# Altium PCB PCB1.PcbDoc
Units mil, origin at the board's own origin, x right, y up, seen from the top; angles counter-clockwise.
Board outline 6170 x 4190 mil, 2 copper layers (Top Layer, Bottom Layer); 55 components, 68 nets, 385 pads, 47 vias.
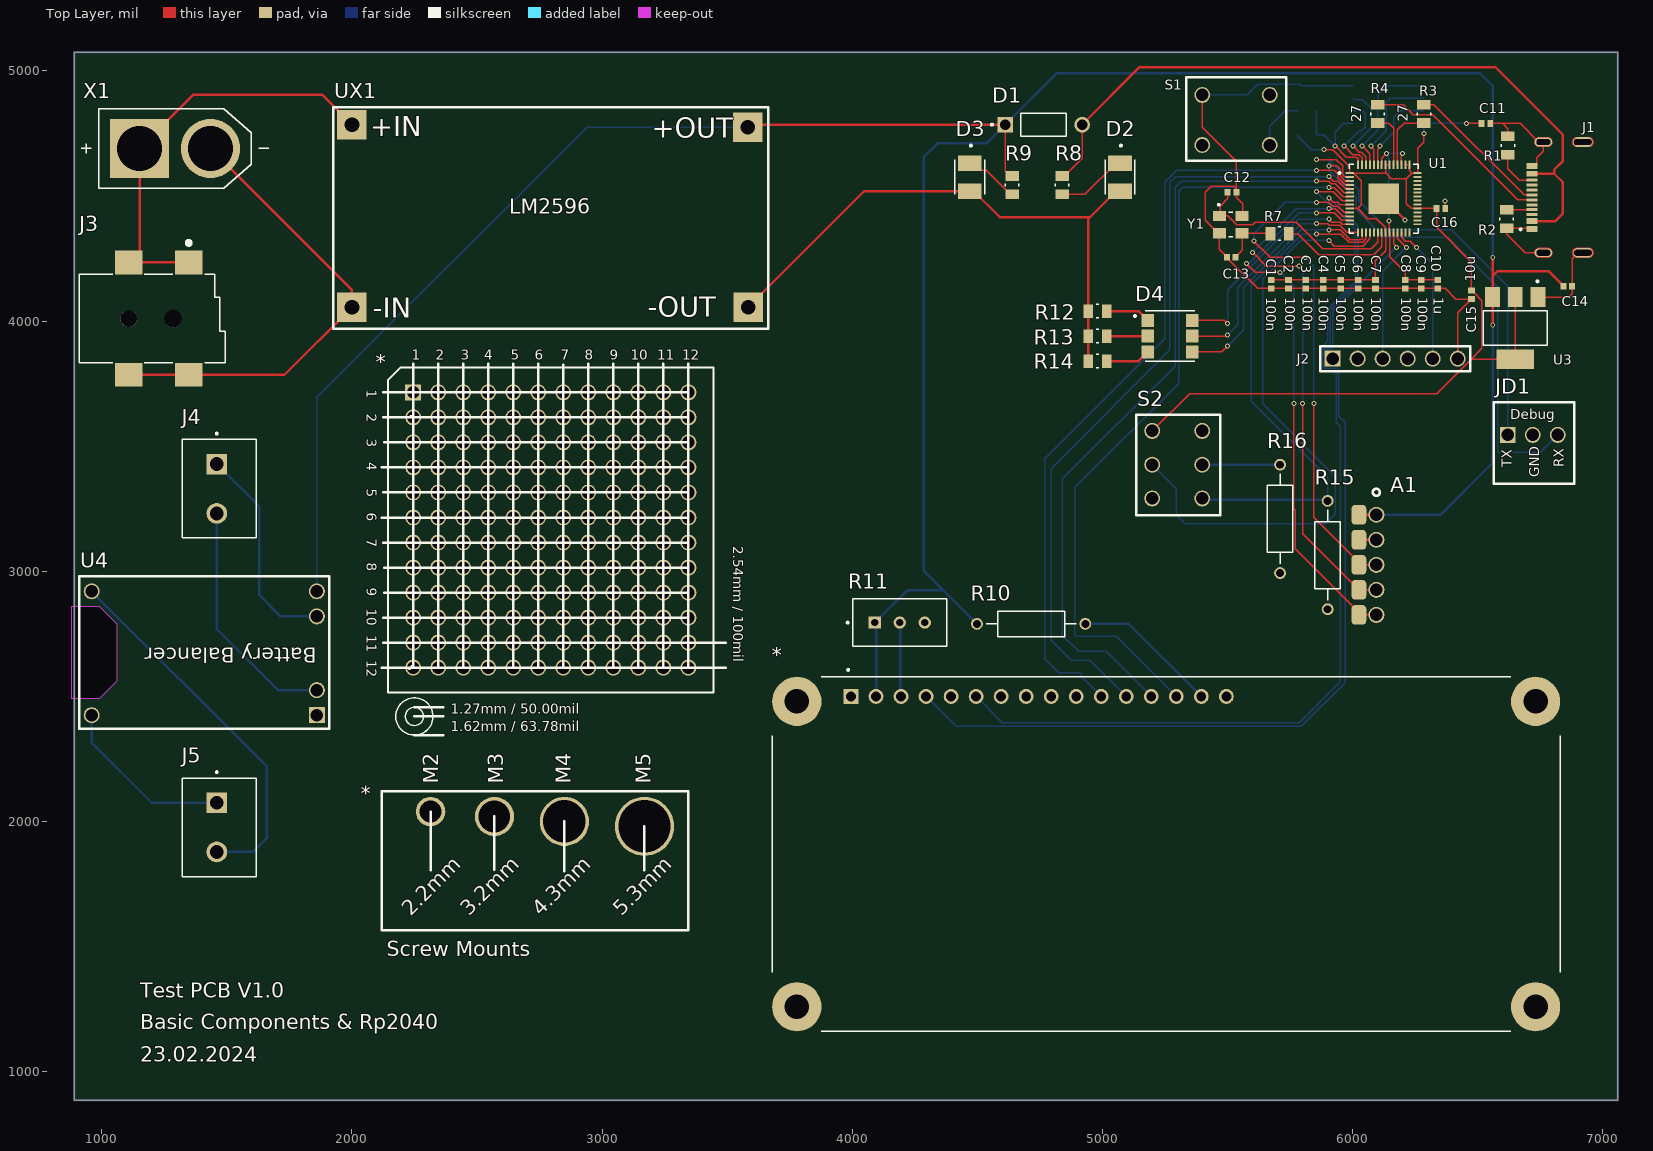
[diagram p0: Top Layer view]
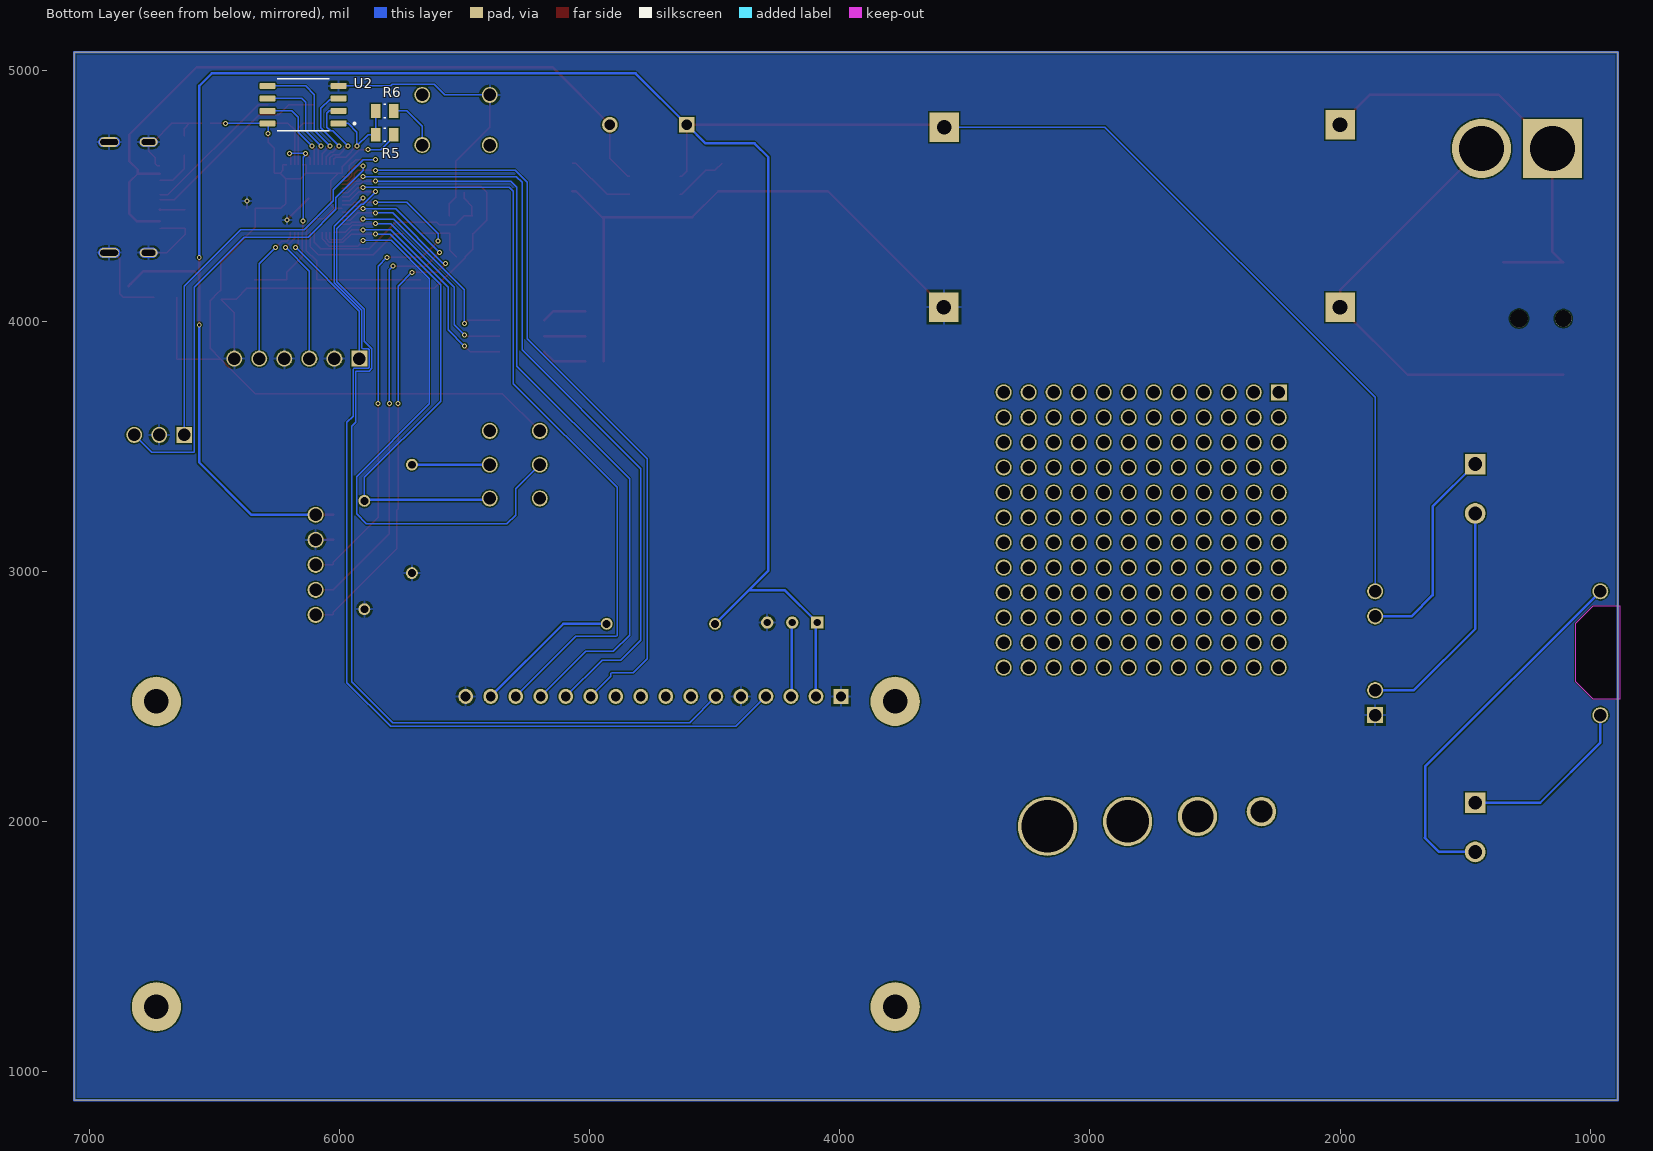
[diagram p1: Bottom Layer view, seen from below]
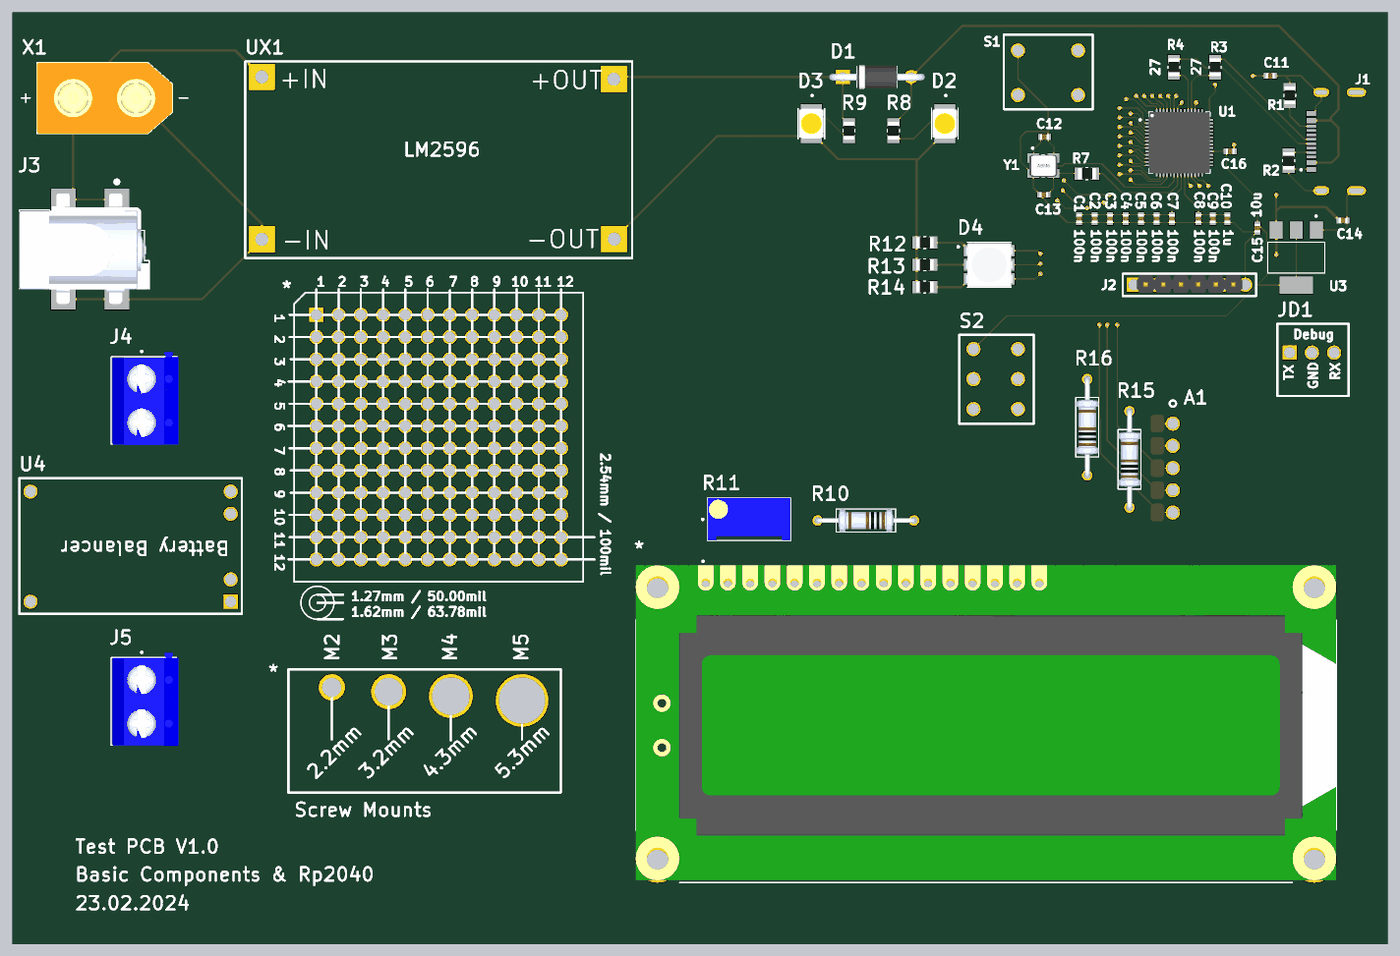
[diagram p2: 3D render of the assembled board from above, using the file's embedded part models]
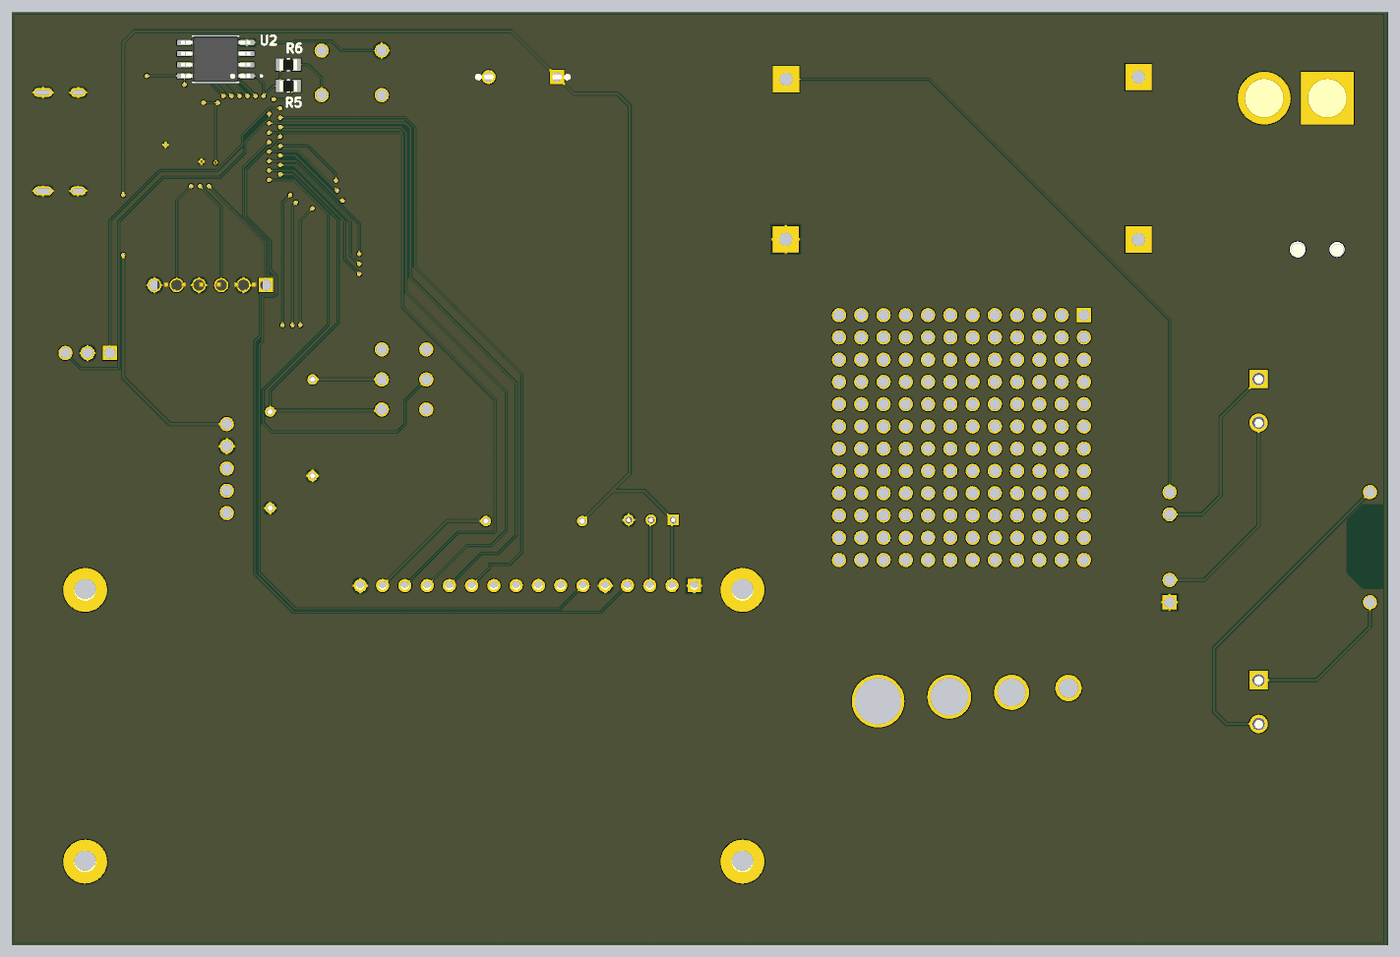
[diagram p3: 3D render of the assembled board from below, using the file's embedded part models]

## Layer stack, top to bottom
Top Solder: solder mask 0.4, Solder Resist, Dk 3.5
Top Layer: signal copper 1.4
Dielectric 1: dielectric 12.6, FR-4, Dk 4.8
Bottom Layer: signal copper 1.4
Bottom Solder: solder mask 0.4, Solder Resist, Dk 3.5

## Board outline
890,885 890,5075 7060,5075 7060,885
cut-out: 990,2860 1060,2790 1060,2560 990,2490 880,2490 880,2860

## Design rules (kind name [scope] priority, off if disabled: settings)
Clearance Clearance_1 [OnMid vs OnMid] p1: gap=5 ignorepadtopadclearanceinfootprint=FALSE sourcerule=38 cellrowname=All cellrowtype=0 cellcolname=All cellcoltype=0 innerlayers=TRUE
Clearance Clearance_2 [(ExistsOnLayer('Top Layer') Or ExistsOnLayer('Bottom Layer')) vs (ExistsOnLayer('Top Layer') Or ExistsOnLayer('Bottom Layer'))] p2: gap=5 ignorepadtopadclearanceinfootprint=FALSE sourcerule=38 cellrowname=All cellrowtype=0 cellcolname=All cellcoltype=0 outerlayers=TRUE
Clearance [All] p3: gap=10 ignorepadtopadclearanceinfootprint=FALSE ismatrix=TRUE
PolygonConnect [All] p1: connectstyle=Relief reliefconductorwidth=10 reliefentries=4 polygonreliefangle="90 Angle" airgapwidth=10
RoutingVias RoutingViaStyle_1 [All] p1: holewidth=11.81 width=19.68 viastyle="Through Hole" minholewidth=11.81 minwidth=19.68 maxholewidth=50 maxwidth=50
RoutingVias [All] p2: holewidth=28 width=50 viastyle="Through Hole" minholewidth=28 minwidth=50 maxholewidth=28 maxwidth=50
SolderMaskExpansion [All] p1: expansion=4 istentingtop=FALSE
Width MaxMinWidth_1 [All] p1: maxlimit=10 minlimit=5 preferedwidth=5 minimp=50.000000 maximp=50.000000 favimp=50.000000
Width [All] p2: maxlimit=10 minlimit=10 preferedwidth=10
30 further rules are at their usual default settings.

## Classes and differential pairs
component class TestBoard: * A1 D4 J3 J4 J5 JD1 R10 R11 R12 R13 R14 R15 R16 S2 U4 UX1 X1
component class U_Power: C14 C15 U3
component class U_Crystal: C12 C13 R7 Y1
component class U_Flash: C11 R5 R6 S1 U2
component class U_USB: D1 D2 D3 J1 R1 R2 R8 R9
component class U_Rp2040: C1 C2 C3 C4 C5 C6 C7 C8 C9 C10 C16 J2 R3 R4 U1

## Components (designator, comment, footprint, x,y, rotation, side; value= is the part's Value field where it differs from the comment)
* "MMounts" "M Mount" 2569.46,2020.63 r0 top
* "PiHoleGrid" PinHoleGrid 2245,3715 r0 top
* "LCDDisplay" LCDDisplay 4980,2200 r0 top
A1 "HC-12" HC-12 6095,3025.85 r270 top
C1 "100n" "SMD Capacator" 5674.02,4147.8 r270 top
C2 "100n" "SMD Capacator" 5743.57,4147.8 r270 top
C3 "100n" "SMD Capacator" 5813.12,4147.8 r270 top
C4 "100n" "SMD Capacator" 5882.68,4147.8 r270 top
C5 "100n" "SMD Capacator" 5952.23,4147.8 r270 top
C6 "100n" "SMD Capacator" 6021.78,4147.8 r270 top
C7 "100n" "SMD Capacator" 6091.34,4147.8 r270 top
C8 "100n" "SMD Capacator" 6210,4147.8 r270 top
C9 "100n" "SMD Capacator" 6275,4147.8 r270 top
C10 "1u" "SMD Capacator" 6340,4147.8 r270 top
C11 "100n" "SMD Capacator" 6532.8,4790 r0 top
C12 "15p" "SMD Capacator" 5517.8,4515 r180 top
C13 "15p" "SMD Capacator" 5515,4255 r0 top
C14 "10u" "SMD Capacator" 6860,4140 r0 top
C15 "10u" "SMD Capacator" 6475,4105 r270 top
C16 "1u" "SMD Capacator" 6352.8,4450 r0 top
D1 "Diode" Diode 4755,4790 r0 top
D2 "SMD LED" "SMD LED" 5070,4575.28 r270 top
D3 "SMD LED" "SMD LED" 4470,4575.28 r270 top
D4 "RGB SMD LED" "SMD RGB LED" 5265,3940 r0 top
J1 "USB C" "USB C" 6865,4509.54 r90 top
J2 "6Pin Connector" "6Pin Connector" 6165.21,3852.54 r0 top
J3 "Barrel Plug SMD" "Barrel Plug SMD" 1192.99,4014.41 r0 top
J4 "Off Board Connector 2Pin" "OFF BORAD CONNECTOR 2PIN" 1460,3325 r270 top
J5 "Off Board Connector 2Pin" "OFF BORAD CONNECTOR 2PIN" 1460,1971.57 r270 top
JD1 "Debug Probe" DebugProbe 6719.19,3543.94 r0 top
R1 "5.1k" "SMD Resistor" 6620.56,4701.61 r90 top
R2 "5.1k" "SMD Resistor" 6615.7,4408.39 r270 top
R3 "27" "SMD Resistor" 6285,4828.39 r90 top
R4 "27" "SMD Resistor" 6100,4828.39 r90 top
R5 "10K" "SMD Resistor" 5818.39,4745 r180 bottom
R6 "10k" "SMD Resistor" 5818.39,4840 r0 bottom
R7 "1k" "SMD Resistor" 5708.39,4350 r0 top
R8 "SMD Resistor" "SMD Resistor" 4839.08,4543.39 r270 top
R9 "SMD Resistor" "SMD Resistor" 4639.08,4543.39 r270 top
R10 "220" Resistor 4710,2790 r180 top
R11 "10k" "Poti 3296" 4190,2795 r0 top
R12 "1k" "SMD Resistor" 4980,4040 r0 top
R13 "1k" "SMD Resistor" 4980,3940 r0 top
R14 "1k" "SMD Resistor" 4980,3840 r0 top
R15 "1k" Resistor 5900,3070 r90 top
R16 "1k" Resistor 5710,3214.56 r90 top
S1 "Button Switch DIP 4 Pin" "Button Switch DIP 4 Pin" 5525,4810 r90 top
S2 "Button Switch DIP 6 Pin" "Button Switch DIP 6 Pin" 5300,3425 r0 top
U1 "RP2040" RP2040 6124.13,4489.58 r0 top
U2 "W25Q128JVS" W25Q128JVS 6140,4855 r0 bottom
U3 "NCP1117" NCP1117 6650,3972.18 r270 top
U4 "BatteryBalancer" BatteryBalancer 1835,2865 r90 top
UX1 "lm2596" LM2596 2795,4470 r0 top
X1 "XT60 Battery Connector" "XT60 Battery Connector" 1293.27,4690 r0 top
Y1 "12Mh Oscillator" "12Mh Oscillator" 5525,4385 r0 top

## Footprints (in the part's own frame and the unit in brackets; to place one, negate y for a bottom-side part, rotate by r counter-clockwise, add the part's x,y. Pads: shape width x height; smd on the part's side, far side on the other; paste and mask are expansions set on the pad)
"6Pin Connector" [mm]
  rect 1.62x1.62 hole 1.27: 1(-6.228,-0.065)
  round 1.62 hole 1.27: 2(-3.688,-0.065) 3(-1.148,-0.065) 4(1.392,-0.065) 5(3.932,-0.065) 6(6.472,-0.065)
  silkscreen extent -7.5,-1.33 7.74,1.21, body extent -5.87,-1 6.13,1, height 6
"12Mh Oscillator" [mm]
  rect 1.3x1.05 smd: 1(-1.459,0.893) 2(0.841,0.893) 3(0.841,-0.857) 4(-1.459,-0.857)
  silkscreen extent -1.62,-1.23 -0.13,2.13, body extent -1.91,-1.23 1.29,1.27, height 0.8
"Barrel Plug SMD" [mm]
  rect 2.8x2.4 smd: 1A(3.937,5.588) 1B(-2.163,5.588) 2(-2.163,-5.812) 3(3.937,-5.812)
  round 1.7 hole 1.7 unplated: ""(-2.163,-0.112)
  round 1.8 hole 1.8 unplated: ""(2.337,-0.112)
  silkscreen extent -7.16,-4.61 7.64,7.78, body extent -7.2,-6.35 7.7,6.25, height 11
BatteryBalancer [mm]
  round 1.62 hole 1.27: "Bat +"(-1.143,-0.635) "Bat -"(-8.636,-0.635) "GND In"(-11.176,22.225) Vin(1.397,22.225) Vout+(1.397,-0.635)
  rect 1.62x1.62 hole 1.27: "Vout -"(-11.176,-0.635)
  silkscreen extent -12.57,-1.91 2.92,23.49, body extent -12.6,-1.91 2.92,23.49, height 4
"Button Switch DIP 4 Pin" [mm]
  round 1.62 hole 1.27: 1(-2.697,3.203) 2(2.383,3.203) 3(-2.697,-3.655) 4(2.383,-3.655)
  silkscreen extent -4.32,-5.33 4.19,4.83, body extent -3.94,-4.95 3.81,4.44, height 6
"Button Switch DIP 6 Pin" [mm]
  round 1.62 hole 1.27: 1(-2.57,3.457) 2(2.51,3.457) 3(-2.57,-3.401) 4(2.51,-3.401) A(-2.57,0.028) K(2.51,0.028)
  silkscreen extent -4.19,-5.08 4.32,5.08, body extent -3.81,-4.7 3.94,4.7, height 6
DebugProbe [mm]
  round 1.62 hole 1.27: GND(0.02,0.027) RX(2.56,0.027)
  rect 1.62x1.62 hole 1.27: TX(-2.52,0.027)
  silkscreen extent -3.92,-4.93 4.21,3.33
Diode [mm]
  round 1.59 hole 1.06: A(4.159,-0.127)
  rect 1.59x1.59 / inner round 1.59 / far side rect 1.59x1.59 hole 1.06: K(-3.651,-0.127)
  silkscreen extent -5.1,-1.31 2.57,1.05, body extent -5.22,-1.47 5.73,1.22, height 2.69
HC-12 [mm]
  round 1.62 hole 1.27: GND(-2.54,0) RXD(0,0) SET(5.08,0) TXD(2.54,0) VCC(-5.08,0)
  rrect50% 2x1.5 smd paste-1 mask+0: GND(-2.54,-1.778) RXD(0,-1.778) SET(5.08,-1.778) TXD(2.54,-1.778) VCC(-5.08,-1.778)
  silkscreen extent -7.72,-0.36 -7.01,0.36, body extent -6.48,-2.79 6.86,24.51, height 5
LCDDisplay [mm]
  rect 1.508x1.508 hole 1: 1(-25.015,7.618)
  round 1.508 hole 1: 2(-22.475,7.618) 3(-19.935,7.618) 4(-17.395,7.618) 5(-14.855,7.618) 6(-12.315,7.618) 7(-9.775,7.618) 8(-7.235,7.618) 9(-4.695,7.618) 10(-2.155,7.618) 11(0.385,7.618) 12(2.925,7.618) 13(5.465,7.618) 14(8.005,7.618) 15(10.545,7.618) 16(13.085,7.618)
  round 5 hole 2.5: S1(-30.515,7.118) S2(44.485,7.118) S3(44.485,-23.882) S4(-30.515,-23.882)
  silkscreen extent -33.01,-26.38 46.98,10.42, body extent -33.02,-26.13 46.99,9.87, height 11
LM2596 [mm]
  rect 3x3 hole 1.5 paste-2539.97 mask+0.102: 1(-20.193,-10.541) 2(-20.193,8.001) 3(20.044,-10.519) 4(20,7.751)
  silkscreen extent -22.1,-12.7 22.1,9.78, body extent -22.22,-12.7 22.1,9.78, height 15
"M Mount" [mm]
  round 3 hole 2.2: 2(-6.477,0.484)
  round 4 hole 3.2: 2(0.014,-0.016)
  round 5 hole 4.3: 2(7.112,-0.516)
  round 6 hole 5.3: 2(15.24,-1.016)
  silkscreen extent -11.43,-11.56 19.68,2.54
NCP1117 [mm]
  rect 2x1.5 smd: 1(-3.15,2.3) 2(-3.15,0) 3(-3.15,-2.3)
  rect 2x3.8 smd: 4(3.15,0)
  silkscreen extent -4.85,-3.25 1.75,3.25
"OFF BORAD CONNECTOR 2PIN" [mm]
  rect 2.1x2.1 hole 1.4: 1(-2.627,0)
  round 2.1 hole 1.4: 2(2.373,0)
  silkscreen extent -5.83,-3.5 4.87,4, body extent -5.68,-3.31 4.92,4.19, height 10
PinHoleGrid [mm]
  rect 1.62x1.62 hole 1.27: 1(0,0)
  round 1.62 hole 1.27: 2(2.54,0) 3(5.08,0) 4(7.62,0) 5(10.16,0) 6(12.7,0) 7(15.24,0) 8(17.78,0) 9(20.32,0) 10(22.86,0) 11(25.4,0) 12(27.94,0) 13(0,-2.54) 14(2.54,-2.54) 15(5.08,-2.54) 16(7.62,-2.54) 17(10.16,-2.54) 18(12.7,-2.54) 19(15.24,-2.54) 20(17.78,-2.54) 21(20.32,-2.54) 22(22.86,-2.54) 23(25.4,-2.54) 24(27.94,-2.54) 25(0,-5.08) 26(2.54,-5.08) 27(5.08,-5.08) 28(7.62,-5.08) 29(10.16,-5.08) 30(12.7,-5.08) 31(15.24,-5.08) 32(17.78,-5.08) 33(20.32,-5.08) 34(22.86,-5.08) 35(25.4,-5.08) 36(27.94,-5.08) 37(0,-7.62) 38(2.54,-7.62) 39(5.08,-7.62) 40(7.62,-7.62) 41(10.16,-7.62) 42(12.7,-7.62) 43(15.24,-7.62) 44(17.78,-7.62) 45(20.32,-7.62) 46(22.86,-7.62) 47(25.4,-7.62) 48(27.94,-7.62) 49(0,-10.16) 50(2.54,-10.16) 51(5.08,-10.16) 52(7.62,-10.16) 53(10.16,-10.16) 54(12.7,-10.16) 55(15.24,-10.16) 56(17.78,-10.16) 57(20.32,-10.16) 58(22.86,-10.16) 59(25.4,-10.16) 60(27.94,-10.16) 61(0,-12.7) 62(2.54,-12.7) 63(5.08,-12.7) 64(7.62,-12.7) 65(10.16,-12.7) 66(12.7,-12.7) 67(15.24,-12.7) 68(17.78,-12.7) 69(20.32,-12.7) 70(22.86,-12.7) 71(25.4,-12.7) 72(27.94,-12.7) 73(0,-15.24) 74(2.54,-15.24) 75(5.08,-15.24) 76(7.62,-15.24) 77(10.16,-15.24) 78(12.7,-15.24) 79(15.24,-15.24) 80(17.78,-15.24) 81(20.32,-15.24) 82(22.86,-15.24) 83(25.4,-15.24) 84(27.94,-15.24) 85(0,-17.78) 86(2.54,-17.78) 87(5.08,-17.78) 88(7.62,-17.78) 89(10.16,-17.78) 90(12.7,-17.78) 91(15.24,-17.78) 92(17.78,-17.78) 93(20.32,-17.78) 94(22.86,-17.78) 95(25.4,-17.78) 96(27.94,-17.78) 97(0,-20.32) 98(2.54,-20.32) 99(5.08,-20.32) 100(7.62,-20.32) 101(10.16,-20.32) 102(12.7,-20.32) 103(15.24,-20.32) 104(17.78,-20.32) 105(20.32,-20.32) 106(22.86,-20.32) 107(25.4,-20.32) 108(27.94,-20.32) 109(0,-22.86) 110(2.54,-22.86) 111(5.08,-22.86) 112(7.62,-22.86) 113(10.16,-22.86) 114(12.7,-22.86) 115(15.24,-22.86) 116(17.78,-22.86) 117(20.32,-22.86) 118(22.86,-22.86) 119(25.4,-22.86) 120(27.94,-22.86) 121(0,-25.4) 122(2.54,-25.4) 123(5.08,-25.4) 124(7.62,-25.4) 125(10.16,-25.4) 126(12.7,-25.4) 127(15.24,-25.4) 128(17.78,-25.4) 129(20.32,-25.4) 130(22.86,-25.4) 131(25.4,-25.4) 132(27.94,-25.4) 133(0,-27.94) 134(2.54,-27.94) 135(5.08,-27.94) 136(7.62,-27.94) 137(10.16,-27.94) 138(12.7,-27.94) 139(15.24,-27.94) 140(17.78,-27.94) 141(20.32,-27.94) 142(22.86,-27.94) 143(25.4,-27.94) 144(27.94,-27.94)
  silkscreen extent -3.17,-34.78 31.75,2.92
"Poti 3296" [mm]
  rect 1.248x1.248 hole 0.74: 1(-2.54,0)
  round 1.248 hole 0.74: 2(0,0) 3(2.54,0)
  silkscreen extent -5.39,-2.41 4.76,2.42, body extent -4.76,-2.41 4.76,2.42, height 11.55
Resistor [mm]
  round 1.2 hole 0.8: 1(-5.627,0) 2(5.373,0)
  silkscreen extent -4.71,-1.3 4.45,1.3, body extent -5.9,-1.3 5.65,1.3, height 2.6
RP2040 [mm]
  rrect25% 0.84x0.2 smd: 1(-3.435,2.6) 2(-3.435,2.2) 3(-3.435,1.8) 4(-3.435,1.4) 5(-3.435,1) 6(-3.435,0.6) 7(-3.435,0.2) 8(-3.435,-0.2) 9(-3.435,-0.6) 10(-3.435,-1) 11(-3.435,-1.4) 12(-3.435,-1.8) 13(-3.435,-2.2) 14(-3.435,-2.6) 29(3.435,-2.6) 30(3.435,-2.2) 31(3.435,-1.8) 32(3.435,-1.4) 33(3.435,-1) 34(3.435,-0.6) 35(3.435,-0.2) 36(3.435,0.2) 37(3.435,0.6) 38(3.435,1) 39(3.435,1.4) 40(3.435,1.8) 41(3.435,2.2) 42(3.435,2.6)
  rrect25% 0.2x0.84 smd: 15(-2.6,-3.435) 16(-2.2,-3.435) 17(-1.8,-3.435) 18(-1.4,-3.435) 19(-1,-3.435) 20(-0.6,-3.435) 21(-0.2,-3.435) 22(0.2,-3.435) 23(0.6,-3.435) 24(1,-3.435) 25(1.4,-3.435) 26(1.8,-3.435) 27(2.2,-3.435) 28(2.6,-3.435) 43(2.6,3.435) 44(2.2,3.435) 45(1.8,3.435) 46(1.4,3.435) 47(1,3.435) 48(0.6,3.435) 49(0.2,3.435) 50(-0.2,3.435) 51(-0.6,3.435) 52(-1,3.435) 53(-1.4,3.435) 54(-1.8,3.435) 55(-2.2,3.435) 56(-2.6,3.435)
  rect 3.1x3.1 smd paste-0.57: 57(0,0)
  silkscreen extent -4.57,-3.5 3.5,3.5, body extent -3.5,-3.5 3.5,3.5, height 0.9
"SMD Capacator" [mm]
  rect 0.6x0.67 smd: 1(-0.437,0) 2(0.437,0)
  body extent -0.5,-0.33 0.5,0.32, height 0.5
"SMD LED" [mm]
  rect 1.6x2.4 smd: A(-1.425,0) K(1.425,0)
  silkscreen extent -3.3,-1.51 1.75,1.51, body extent -1.75,-1.4 1.75,1.4, height 1.9
"SMD Resistor" [mm]
  rect 0.97x1.38 smd: 1(-0.93,0) 2(0.93,0)
  silkscreen extent -0.12,-0.68 0.12,0.68, body extent -0.98,-0.63 1.02,0.63, height 0.6
"SMD RGB LED" [mm]
  rect 1.3x1.3 smd: 1(-2.123,1.6) 2(-2.123,0) 3(-2.123,-1.6) 4(2.377,-1.6) 5(2.377,0) 6(2.377,1.6)
  silkscreen extent -3.52,-2.57 2.63,2.57, body extent -2.57,-2.5 2.83,2.5, height 1.6
"USB C" [mm]
  rect 0.6x1.1 smd: A1_B12(-3.581,3.753) A4_B9(-2.781,3.753) B1_A12(2.819,3.753) B4_A9(2.019,3.753)
  rect 0.3x1.1 smd: A5(-1.631,3.753) A6(-0.631,3.753) A7(-0.131,3.753) A8(0.869,3.753) B5(1.369,3.753) B6(0.369,3.753) B7(-1.131,3.753) B8(-2.131,3.753)
  oval 1x2 hole 0.6 slot 1.8 at 90 deg mask+0: S1(-6.001,-1.397) S2(5.239,-1.397)
  oval 0.9x1.8 hole 0.6 slot 1.4 at 90 deg mask+0: S3(-6.001,2.603) S4(5.239,2.603)
  Top Layer region: 5.291,-0.3 5.343,-0.308 5.394,-0.321 5.442,-0.34 5.489,-0.364 5.533,-0.392 5.574,-0.425 5.611,-0.462 5.644,-0.503 5.672,-0.547 5.696,-0.594 5.715,-0.642 5.728,-0.693 5.736,-0.745 5.739,-0.797 5.739,-1.997 5.736,-2.049 5.728,-2.101 5.715,-2.152 5.696,-2.2 5.672,-2.247 5.644,-2.291 5.611,-2.332 5.574,-2.369 5.533,-2.402 5.489,-2.43 5.442,-2.454 5.394,-2.473 5.343,-2.486 5.291,-2.494 5.239,-2.497 5.187,-2.494 5.135,-2.486 5.084,-2.473 5.036,-2.454 4.989,-2.43 4.945,-2.402 4.904,-2.369 4.867,-2.332 4.834,-2.291 4.806,-2.247 4.782,-2.2 4.763,-2.152 4.75,-2.101 4.742,-2.049 4.739,-1.997 4.739,-0.797 4.742,-0.745 4.75,-0.693 4.763,-0.642 4.782,-0.594 4.806,-0.547 4.834,-0.503 4.867,-0.462 4.904,-0.425 4.945,-0.392 4.989,-0.364 5.036,-0.34 5.084,-0.321 5.135,-0.308 5.187,-0.3 5.239,-0.297
  Top Layer region: -5.949,-0.3 -5.897,-0.308 -5.846,-0.321 -5.798,-0.34 -5.751,-0.364 -5.707,-0.392 -5.666,-0.425 -5.629,-0.462 -5.596,-0.503 -5.568,-0.547 -5.544,-0.594 -5.525,-0.642 -5.512,-0.693 -5.504,-0.745 -5.501,-0.797 -5.501,-1.997 -5.504,-2.049 -5.512,-2.101 -5.525,-2.152 -5.544,-2.2 -5.568,-2.247 -5.596,-2.291 -5.629,-2.332 -5.666,-2.369 -5.707,-2.402 -5.751,-2.43 -5.798,-2.454 -5.846,-2.473 -5.897,-2.486 -5.949,-2.494 -6.001,-2.497 -6.053,-2.494 -6.105,-2.486 -6.156,-2.473 -6.204,-2.454 -6.251,-2.43 -6.295,-2.402 -6.336,-2.369 -6.373,-2.332 -6.406,-2.291 -6.434,-2.247 -6.458,-2.2 -6.477,-2.152 -6.49,-2.101 -6.498,-2.049 -6.501,-1.997 -6.501,-0.797 -6.498,-0.745 -6.49,-0.693 -6.477,-0.642 -6.458,-0.594 -6.434,-0.547 -6.406,-0.503 -6.373,-0.462 -6.336,-0.425 -6.295,-0.392 -6.251,-0.364 -6.204,-0.34 -6.156,-0.321 -6.105,-0.308 -6.053,-0.3 -6.001,-0.297
  Top Layer region: 5.291,3.5 5.343,3.492 5.394,3.479 5.442,3.46 5.489,3.436 5.533,3.408 5.574,3.375 5.611,3.338 5.644,3.297 5.672,3.253 5.696,3.206 5.715,3.158 5.728,3.107 5.736,3.055 5.739,3.003 5.739,2.203 5.736,2.151 5.728,2.099 5.715,2.048 5.696,2 5.672,1.953 5.644,1.909 5.611,1.868 5.574,1.831 5.533,1.798 5.489,1.77 5.442,1.746 5.394,1.727 5.343,1.714 5.291,1.706 5.239,1.703 5.187,1.706 5.135,1.714 5.084,1.727 5.036,1.746 4.989,1.77 4.945,1.798 4.904,1.831 4.867,1.868 4.834,1.909 4.806,1.953 4.782,2 4.763,2.048 4.75,2.099 4.742,2.151 4.739,2.203 4.739,3.003 4.742,3.055 4.75,3.107 4.763,3.158 4.782,3.206 4.806,3.253 4.834,3.297 4.867,3.338 4.904,3.375 4.945,3.408 4.989,3.436 5.036,3.46 5.084,3.479 5.135,3.492 5.187,3.5 5.239,3.503
  Top Layer region: -5.949,3.5 -5.897,3.492 -5.846,3.479 -5.798,3.46 -5.751,3.436 -5.707,3.408 -5.666,3.375 -5.629,3.338 -5.596,3.297 -5.568,3.253 -5.544,3.206 -5.525,3.158 -5.512,3.107 -5.504,3.055 -5.501,3.003 -5.501,2.203 -5.504,2.151 -5.512,2.099 -5.525,2.048 -5.544,2 -5.568,1.953 -5.596,1.909 -5.629,1.868 -5.666,1.831 -5.707,1.798 -5.751,1.77 -5.798,1.746 -5.846,1.727 -5.897,1.714 -5.949,1.706 -6.001,1.703 -6.053,1.706 -6.105,1.714 -6.156,1.727 -6.204,1.746 -6.251,1.77 -6.295,1.798 -6.336,1.831 -6.373,1.868 -6.406,1.909 -6.434,1.953 -6.458,2 -6.477,2.048 -6.49,2.099 -6.498,2.151 -6.501,2.203 -6.501,3.003 -6.498,3.055 -6.49,3.107 -6.477,3.158 -6.458,3.206 -6.434,3.253 -6.406,3.297 -6.373,3.338 -6.336,3.375 -6.295,3.408 -6.251,3.436 -6.204,3.46 -6.156,3.479 -6.105,3.492 -6.053,3.5 -6.001,3.503
  Bottom Layer region: 5.291,-0.3 5.343,-0.308 5.394,-0.321 5.442,-0.34 5.489,-0.364 5.533,-0.392 5.574,-0.425 5.611,-0.462 5.644,-0.503 5.672,-0.547 5.696,-0.594 5.715,-0.642 5.728,-0.693 5.736,-0.745 5.739,-0.797 5.739,-1.997 5.736,-2.049 5.728,-2.101 5.715,-2.152 5.696,-2.2 5.672,-2.247 5.644,-2.291 5.611,-2.332 5.574,-2.369 5.533,-2.402 5.489,-2.43 5.442,-2.454 5.394,-2.473 5.343,-2.486 5.291,-2.494 5.239,-2.497 5.187,-2.494 5.135,-2.486 5.084,-2.473 5.036,-2.454 4.989,-2.43 4.945,-2.402 4.904,-2.369 4.867,-2.332 4.834,-2.291 4.806,-2.247 4.782,-2.2 4.763,-2.152 4.75,-2.101 4.742,-2.049 4.739,-1.997 4.739,-0.797 4.742,-0.745 4.75,-0.693 4.763,-0.642 4.782,-0.594 4.806,-0.547 4.834,-0.503 4.867,-0.462 4.904,-0.425 4.945,-0.392 4.989,-0.364 5.036,-0.34 5.084,-0.321 5.135,-0.308 5.187,-0.3 5.239,-0.297
  Bottom Layer region: -5.949,-0.3 -5.897,-0.308 -5.846,-0.321 -5.798,-0.34 -5.751,-0.364 -5.707,-0.392 -5.666,-0.425 -5.629,-0.462 -5.596,-0.503 -5.568,-0.547 -5.544,-0.594 -5.525,-0.642 -5.512,-0.693 -5.504,-0.745 -5.501,-0.797 -5.501,-1.997 -5.504,-2.049 -5.512,-2.101 -5.525,-2.152 -5.544,-2.2 -5.568,-2.247 -5.596,-2.291 -5.629,-2.332 -5.666,-2.369 -5.707,-2.402 -5.751,-2.43 -5.798,-2.454 -5.846,-2.473 -5.897,-2.486 -5.949,-2.494 -6.001,-2.497 -6.053,-2.494 -6.105,-2.486 -6.156,-2.473 -6.204,-2.454 -6.251,-2.43 -6.295,-2.402 -6.336,-2.369 -6.373,-2.332 -6.406,-2.291 -6.434,-2.247 -6.458,-2.2 -6.477,-2.152 -6.49,-2.101 -6.498,-2.049 -6.501,-1.997 -6.501,-0.797 -6.498,-0.745 -6.49,-0.693 -6.477,-0.642 -6.458,-0.594 -6.434,-0.547 -6.406,-0.503 -6.373,-0.462 -6.336,-0.425 -6.295,-0.392 -6.251,-0.364 -6.204,-0.34 -6.156,-0.321 -6.105,-0.308 -6.053,-0.3 -6.001,-0.297
  Bottom Layer region: 5.291,3.5 5.343,3.492 5.394,3.479 5.442,3.46 5.489,3.436 5.533,3.408 5.574,3.375 5.611,3.338 5.644,3.297 5.672,3.253 5.696,3.206 5.715,3.158 5.728,3.107 5.736,3.055 5.739,3.003 5.739,2.203 5.736,2.151 5.728,2.099 5.715,2.048 5.696,2 5.672,1.953 5.644,1.909 5.611,1.868 5.574,1.831 5.533,1.798 5.489,1.77 5.442,1.746 5.394,1.727 5.343,1.714 5.291,1.706 5.239,1.703 5.187,1.706 5.135,1.714 5.084,1.727 5.036,1.746 4.989,1.77 4.945,1.798 4.904,1.831 4.867,1.868 4.834,1.909 4.806,1.953 4.782,2 4.763,2.048 4.75,2.099 4.742,2.151 4.739,2.203 4.739,3.003 4.742,3.055 4.75,3.107 4.763,3.158 4.782,3.206 4.806,3.253 4.834,3.297 4.867,3.338 4.904,3.375 4.945,3.408 4.989,3.436 5.036,3.46 5.084,3.479 5.135,3.492 5.187,3.5 5.239,3.503
  Bottom Layer region: -5.949,3.5 -5.897,3.492 -5.846,3.479 -5.798,3.46 -5.751,3.436 -5.707,3.408 -5.666,3.375 -5.629,3.338 -5.596,3.297 -5.568,3.253 -5.544,3.206 -5.525,3.158 -5.512,3.107 -5.504,3.055 -5.501,3.003 -5.501,2.203 -5.504,2.151 -5.512,2.099 -5.525,2.048 -5.544,2 -5.568,1.953 -5.596,1.909 -5.629,1.868 -5.666,1.831 -5.707,1.798 -5.751,1.77 -5.798,1.746 -5.846,1.727 -5.897,1.714 -5.949,1.706 -6.001,1.703 -6.053,1.706 -6.105,1.714 -6.156,1.727 -6.204,1.746 -6.251,1.77 -6.295,1.798 -6.336,1.831 -6.373,1.868 -6.406,1.909 -6.434,1.953 -6.458,2 -6.477,2.048 -6.49,2.099 -6.498,2.151 -6.501,2.203 -6.501,3.003 -6.498,3.055 -6.49,3.107 -6.477,3.158 -6.458,3.206 -6.434,3.253 -6.406,3.297 -6.373,3.338 -6.336,3.375 -6.295,3.408 -6.251,3.436 -6.204,3.46 -6.156,3.479 -6.105,3.492 -6.053,3.5 -6.001,3.503
  silkscreen extent -3.72,4.81 -3.52,5.01
W25Q128JVS [mm]
  rrect25% 1.61x0.58 smd: 1(-3.478,1.651) 2(-3.478,0.381) 3(-3.478,-0.889) 4(-3.478,-2.159) 5(3.732,-2.159) 6(3.732,-0.889) 7(3.732,0.381) 8(3.732,1.651)
  silkscreen extent -5.19,-2.89 2.77,2.39, body extent -3.82,-2.89 4.08,2.39, height 2.16
"XT60 Battery Connector" [mm]
  round 6 hole 4.55: N(3.6,0)
  rect 6x6 / inner round 6 / far side rect 6x6 hole 4.55: P(-3.6,0)
  silkscreen extent -9.5,-4.05 9.5,4.05, body extent -7.75,-4.05 7.75,4.05, height 16

## Part data
C1 C2 C3 C4 C5 C6 C7 C8 C9 C10 C11 C12 C13 C14 C15 C16: library part "SMD Capacator"
J4 J5: "Screw Connector"
R1 R2 R3 R4 R5 R6 R7 R12 R13 R14: library part "SMD Resistor"
R10 R15 R16: library part Resistor
R11: library part "Poti 3296"

## Via types
v1: diameter 20, hole 12, Top Layer to Bottom Layer, 36 vias
v2: diameter 19.68, hole 11.81, Top Layer to Bottom Layer, 11 vias

## Nets (pads, with @x,y where several pads share a name; then routed paths per layer and width w, separated by ;. In a path a pad name is that pad's centre, name@x,y a point inside that pad or via, vN(x,y) a via of type N, cw(c..) or ccw(c..) an arc to the next point about the centre after c; other vN are vias at no path point)
1V1: C8.1 C9.1 C10.1 U1.23 U1.45 U1.50 | length 831.3
  Top Layer w5: U1.50 6116.26,4651.26 v1(6135,4670) ; v1(6145,4400) 6146.38,4398.62 6146.38,4355.72 U1.23 6147.76,4257.24 6210,4195 C8.1 C9.1 C10.1 ; U1.45 6195,4660.94 6200,4665.94 v1(6200,4670)
  Bottom Layer w5: v1(6145,4400) 6145,4655.94 6135,4665.94 v1(6135,4670) v1(6200,4670)
3V3: C1.1 C2.1 C3.1 C4.1 C5.1 C6.1 C7.1 C11.1 C15.1 C16.1 R5.2 S2.1 U1.1 U1.10 U1.22 U1.33 U1.42 U1.43 U1.44 U1.48 U1.49 U2.8 U3.2 U3.4 | length 4838.1
  Top Layer w5: S2.1 5347.97,3710.26 6335.96,3710.26 6473.87,3848.17 ; C1.1 C2.1 C3.1 C4.1 C5.1 C6.1 C7.1 6091.34,4241.34 6132.01,4282.01 U1.22 6130.57,4355.78 6130.57,4374.43 6095,4410 6060.41,4410 6020.21,4450.21 ; v1(5885,4685) 5920,4685 5988.9,4616.1 U1.1 U1.1@6003.65,4591.94 ; U1.10 6020.21,4450.21 ; U1.48 U1.49 6132.01,4592.99 ; U1.44 U1.43 6226.5,4602.38 6236.94,4591.94 ; v1(6285,4750) 6285,4715 6260,4690 6260,4592.57 U1.42 6236.94,4591.94 ; v1(6455,4790) C11.1 ; C15.1 6475,4235.91 6335.59,4375.32 C16.1 6335.38,4450.21 U1.33 6234.79,4450.21 6215,4470 6215,4570 ; C15.1 6476.38,4122.2 6485.69,4112.89 6485.69,4112.71 6516.83,4081.57 6516.83,3891.13 6473.87,3848.17 ; U3.2 U3.4 6473.87,3848.17 ; U1.1@6003.65,4591.94 6130.95,4591.94 6132.01,4592.99 ; U1.1@6003.65,4591.94 6035,4560.59 6035,4465 6020.21,4450.21 ; 6132.01,4592.99 6155,4570 6215,4570 ; 6215,4570 6236.94,4591.94
  Bottom Layer w5: R5.2 5781.77,4736.93 5833.7,4685 v1(5885,4685) ; v1(6285,4750) 6285,4788.07 U2.8 v1(6455,4790)
+5: *.2@4095.16,2499.92 A1.VCC C14.1 D1.K R9.1 R10.2 R11.1 U3.3 U4.Vout+ UX1.4 | length 11656
  Top Layer w5: D1.K 4611.28,4599.73 4631.01,4580 R9.1
  Top Layer w10: UX1.4 3592.27,4785 D1.K ; A1.VCC@6025,3225.85 A1.VCC@6095,3225.85 ; v2(6560,3985) 6560,4095.65 U3.3 6559.45,4179.45 ; v2(6560,4255) 6559.45,4254.45 6559.45,4179.45 ; C14.1 6842.8,4141.38 6835.98,4148.19 6834.61,4148.19 6782.8,4200 6580,4200 6559.45,4179.45
  Bottom Layer w5: U4.Vout+ 1860,3695 2940.14,4775.14 UX1.4
  Bottom Layer w10: *.2@4095.16,2499.92 4095.16,2789.84 R11.1 4220,2925 4363.46,2925 ; R10.2 4363.46,2925 ; A1.VCC@6095,3225.85 6350.85,3225.85 6560,3435 v2(6560,3985) ; v2(6560,4255) 6560,4940 6510,4990 4816.28,4990 D1.K 4536.28,4710 4340,4710 4285,4655 4285,3003.46 4363.46,2925
GND: "U4.Vout -" *.1@3995.16,2499.92 *.5@4395.16,2499.92 *.16@5495.16,2499.92 A1.GND C1.2 C2.2 C3.2 C4.2 C5.2 C6.2 C7.2 C8.2 C9.2 C10.2 C11.2 C12.1 C13.1 C14.2 C15.2 C16.2 D2.K D3.K J1.A1_B12 J1.B1_A12 J1.S1 J1.S2 J1.S3 J1.S4 J2.2 J2.4 J2.6 JD1.GND R1.2 R2.2 R11.3 R12.1 R13.1 R14.1 R15.1 R16.1 S1.2 U1.57 U2.4 U3.1 UX1.3 Y1.2 Y1.4 | length 6546.3
  Top Layer w5: S1.2 5398.9,4774.85 5535,4638.75 5535,4530 ; Y1.2 5560,4422.05 5560,4470 5535,4495 C12.1 5535,4530 ; C16.2 v1(6370,4480) ; J2.6 6420,4034.17 C15.2@6473.62,4087.8 ; C15.2 C15.2@6473.62,4087.8 ; C11.2 6600,4790 ; R1.2 6620.56,4769.44 6600,4790 ; J1.A1_B12 6714.03,4371.77 R2.2 6615.7,4346.98 6689.4,4273.28 J1.S3 ; J1.B1_A12 6727.09,4620.52 6736.4,4629.83 6736.4,4652.72 6762.52,4678.85 J1.S4 ; U3.1 6863.8,4096.2 6877.2,4109.61 C14.2 6877.2,4250.17 6900.31,4273.28 J1.S1 ; J1.S4@6744.8,4715.8 6670.6,4790 6600,4790 ; 5535,4530 5525,4540 5435,4540 5410,4515 5410,4403.92 5462.65,4351.27 Y1.4 5467.57,4286.61 5497.8,4256.38 C13.1 5497.8,4253.62 5620.83,4130.59 C1.2 C2.2 C3.2 C4.2 C5.2 C6.2 C7.2 C8.2 C9.2 C10.2 6369.41,4130.59 6412.2,4087.8 C15.2@6473.62,4087.8
  Top Layer w10: UX1.3 4047.44,4519.17 D3.K 4485.75,4519.17 4589.92,4415 4950.08,4415 ; R14.1 R13.1 R12.1 4943.39,4408.31 4950.08,4415 ; D2.K 5054.25,4519.17 4950.08,4415 ; A1.GND@6025,3125.85 A1.GND@6095,3125.85 ; U1.57 v1(6208.71,4405) ; J1.S4@6744.8,4715.8 J1.S4
  Bottom Layer w5: S1.2 5579.31,4903.81 5621.56,4946.06 5788.94,4946.06 5795,4940 U2.4
Net*_3: *.3@4195.16,2499.92 R11.2 | length 297.2
  Bottom Layer w10: R11.2 4192.58,2792.42 4192.58,2502.5 *.3@4195.16,2499.92
Net*_4: *.4@4295.16,2499.92 U1.9 | length 4019.6
  Top Layer w5: v1(5905,4492.5) 5922.5,4475 5940,4475 5949.05,4465.95 U1.9
  Bottom Layer w5: *.4@4295.16,2499.92 4415.08,2380 5795,2380 5970,2555 5970,3595 5945,3620 5945,3807.68 5942.07,3810.61 5885,3810.61 5880.61,3815 5880.61,3885 5885,3889.39 5907.07,3889.39 5910,3892.32 5910,4044.14 6020,4154.14 6020,4380 5907.5,4492.5 v1(5905,4492.5)
Net*_6: *.6@4495.16,2499.92 U1.8 | length 3863.3
  Top Layer w5: v1(5855,4517.5) 5922.5,4517.5 5958.3,4481.7 U1.8
  Bottom Layer w5: *.6@4495.16,2499.92 4600.08,2395 5787.07,2395 5950,2557.93 5950,3580 5935,3595 5935,3797.68 5932.07,3800.61 5880.86,3800.61 5870.61,3810.86 5870.61,3889.14 5900,3918.53 5900,4048.28 6010,4158.28 6010,4370 5912.5,4467.5 5905,4467.5 v1(5855,4517.5)
Net*_11: *.11@4995.16,2499.92 U1.4 | length 3189.5
  Top Layer w5: v1(5855,4602.5) 5927.5,4602.5 5940,4590 5940,4575 5968.87,4546.13 5987.46,4546.13 U1.4
  Bottom Layer w5: *.11@4995.16,2499.92 4915,2580.08 4915,2592.07 4912.07,2595 4825,2595 4770,2650 4770,3450 5250,3930 5250,4555 5297.5,4602.5 v1(5855,4602.5)
Net*_12: *.12@5095.16,2499.92 U1.5 | length 3168.5
  Top Layer w5: v1(5905,4577.5) 5922.5,4560 5940,4560 5969.62,4530.38 5987.46,4530.38 U1.5
  Bottom Layer w5: *.12@5095.16,2499.92 4950.08,2645 4875,2645 4795,2725 4795,3410 5270,3885 5270,4555 5292.5,4577.5 v1(5905,4577.5)
Net*_13: *.13@5195.16,2499.92 U1.6 | length 3161.7
  Top Layer w5: v1(5855,4560) 5904.75,4560 5914.75,4550 5930,4550 5966.8,4513.2 U1.6
  Bottom Layer w5: *.13@5195.16,2499.92 5015.08,2680 4905,2680 4840,2745 4840,3370 5290,3820 5290,4535 5315,4560 v1(5855,4560)
Net*_14: *.14@5295.16,2499.92 U1.7 | length 3160.4
  Top Layer w5: v1(5905,4535) 5907.07,4532.93 5927.07,4532.93 5962.55,4497.45 U1.7
  Bottom Layer w5: *.14@5295.16,2499.92 5055.08,2740 4892.93,2740 4890,2742.93 4890,3335 5305,3750 5305,4520 5320,4535 v1(5905,4535)
Net*_15: *.15@5395.16,2499.92 R10.1 | length 583.8
  Bottom Layer w10: R10.1 5105.08,2790 *.15@5395.16,2499.92
NetA1_RXD: A1.RXD U1.11 | length 2102.6
  Top Layer w5: v2(5605,4320) 5670,4255 v2(5810,4255) ; v2(5845,3670) 5845,3215.69 6025,3035.69 6025,3025.85 A1.RXD@6095,3025.85 ; v1(5855,4475) 5904.75,4475 5919.75,4460 5940,4460 5965.54,4434.46 U1.11
  Bottom Layer w5: v2(5605,4320) 5605,4350 5730,4475 v1(5855,4475) ; v2(5810,4255) 5845,4220 v2(5845,3670)
NetA1_SET: A1.SET U1.13 | length 2229.1
  Top Layer w5: v2(5575,4230) 5610,4195 v2(5710,4195) ; v2(5765,3670) 5765,3250 5770,3245 5770,3090.69 6025,2835.69 6025,2825.85 A1.SET@6095,2825.85 ; v1(5855,4432.5) 5927.5,4432.5 5957.04,4402.96 U1.13
  Bottom Layer w5: v2(5575,4230) 5577.26,4232.26 5587.26,4232.26 5787.5,4432.5 v1(5855,4432.5) ; v2(5710,4195) 5765,4140 v2(5765,3670)
NetA1_TXD: A1.TXD U1.12 | length 2145.7
  Top Layer w5: v2(5600,4275) 5655,4220 v2(5785,4220) ; v2(5800,3670) 5800,3150.85 6025,2925.85 A1.TXD@6095,2925.85 ; v1(5905,4450) 5930,4450 5961.29,4418.71 U1.12
  Bottom Layer w5: v2(5600,4275) 5775,4450 v1(5905,4450) ; v2(5785,4220) 5800,4205 v2(5800,3670)
NetC12_2: C12.2 U1.20 Y1.1 | length 853.1
  Top Layer w5: C12.2 5500.59,4490.59 5470,4460 5470,4422.6 Y1.1 5501.25,4420.17 5536.42,4385 5600,4385 5610,4395 5775,4395 5880,4290 6075,4290 6100.51,4315.51 U1.20
NetC13_2: C13.2 R7.1 Y1.3 | length 221.2
  Top Layer w5: C13.2 5532.2,4256.38 5558.12,4282.29 Y1.3 5670.5,4351.27 R7.1
NetD2_A: D2.A R8.2 | length 282.5
  Top Layer w5: R8.2 4929.65,4506.77 5054.25,4631.38 D2.A
NetD3_A: D3.A R9.2 | length 220.7
  Top Layer w5: D3.A 4499,4602.38 4535.4,4602.38 4631.01,4506.77 R9.2
NetD4_1: D4.1 R12.2 | length 180.1
  Top Layer w10: R12.2 5144.41,4040 D4.1
NetD4_2: D4.2 R13.2 | length 164.8
  Top Layer w10: R13.2 D4.2
NetD4_3: D4.3 R14.2 | length 180.1
  Top Layer w10: R14.2 5144.41,3840 D4.3
NetD4_4: D4.4 U1.16 | length 1024.8
  Top Layer w5: D4.4 5477.01,3877.01 v1(5500,3900) ; v1(5905,4365) 5950,4365 5990,4325 6034.59,4325 6037.52,4327.93 U1.16
  Bottom Layer w5: v1(5500,3900) 5565,3965 5565,4135 5795,4365 v1(5905,4365)
NetD4_5: D4.5 U1.15 | length 952.2
  Top Layer w5: D4.5 5490.94,3940 5495.94,3945 v1(5500,3945) ; v1(5855,4390) 5899.96,4390 5907.03,4382.93 5947.93,4382.93 5976.52,4354.34 U1.15
  Bottom Layer w5: v1(5500,3945) 5540,3985 5540,4135 5795,4390 v1(5855,4390)
NetD4_6: D4.6 U1.14 | length 896.1
  Top Layer w5: D4.6 5487.01,4002.99 v1(5500,3990) ; v1(5905,4407.5) 5917.5,4395 5950,4395 5957.79,4387.21 U1.14
  Bottom Layer w5: v1(5500,3990) 5500,4125 5782.5,4407.5 v1(5905,4407.5)
NetJ1_A5: J1.A5 R2.1 | length 102.4
  Top Layer w5: R2.1 6616.02,4445.32 6715.43,4445.32 J1.A5@6716.34,4444.42
  Top Layer w10: J1.A5@6716.34,4444.42 J1.A5
NetJ1_A6: J1.A6 R4.2 | length 774.8
  Top Layer w5: R4.2 6202.33,4865 6242.33,4825 6320,4825 6660.31,4484.69 J1.A6
NetJ1_A7: J1.A7 R3.2 | length 581.6
  Top Layer w5: R3.2 6325,4865 6685.62,4504.38 J1.A7
NetJ1_B5: J1.B5 R1.1 | length 171.3
  Top Layer w5: R1.1 6620.56,4609.44 6666.57,4563.43 J1.B5
NetJ2_1: J2.1 U1.24 | length 614.7
  Top Layer w5: U1.24 6163.5,4308.25 6175,4296.76 v1(6175,4295)
  Bottom Layer w5: J2.1 5920,4040 v1(6175,4295)
NetJ2_3: J2.3 U1.25 | length 558.5
  Top Layer w5: U1.25 6179.25,4330.75 v1(6215,4295)
  Bottom Layer w5: J2.3 6120,4200 v1(6215,4295)
NetJ2_5: J2.5 U1.26 | length 567.8
  Top Layer w5: U1.26 6195.58,4353.76 6195.58,4334.42 6210,4320 6230,4320 v1(6255,4295)
  Bottom Layer w5: v1(6255,4295) 6320,4230 J2.5
NetJ3_1A: J3.1A J3.1B UX1.2 X1.P | length 1700.5
  Top Layer w10: J3.1B J3.1B@1109.29,4234.41 ; J3.1A J3.1B@1109.29,4234.41 ; UX1.2 1880,4905 1366.54,4905 X1.P 1151.54,4276.65 J3.1B@1109.29,4234.41
NetJ3_2: J3.2 J3.3 UX1.1 X1.N | length 1872.8
  Top Layer w10: J3.2 J3.3 1730.59,3785.59 UX1.1 2000,4125 X1.N
NetJ4_1: "U4.Bat +" J4.1 | length 859
  Bottom Layer w10: J4.1 1630,3258.43 1630,2905 1715,2820 1860,2820
NetJ4_2: "U4.Bat -" J4.2 | length 963.1
  Bottom Layer w10: J4.2 1460,2770 1705,2525 1860,2525
NetJ5_1: "U4.GND In" J5.1 | length 709.4
  Bottom Layer w10: 960,2425 960,2315 1200,2075 J5.1
NetJ5_2: J5.2 U4.Vin | length 1500.2
  Bottom Layer w10: U4.Vin 1660,2220 1660,1935 1660.86,1934.14 1604.87,1878.15 J5.2
NetJD1_RX: JD1.RX U1.3 | length 1965.2
  Top Layer w5: v1(5905,4620) 5937.07,4620 5950,4607.07 5950,4580.86 5968.98,4561.88 5987.46,4561.88 U1.3
  Bottom Layer w5: v1(5905,4620) 5905,4602.25 6013.81,4493.44 6013.81,4446.19 6125,4335 6380,4335 6580,4135 6580,3477.93 6582.93,3475 6750,3475 JD1.RX
NetJD1_TX: JD1.TX U1.2 | length 1778.3
  Top Layer w5: v1(5855,4645) 5935,4645 5960,4620 5960,4585 5967.37,4577.63 5987.46,4577.63 U1.2
  Bottom Layer w5: v1(5855,4645) 5904.75,4645 6023.81,4525.94 6023.81,4481.19 6140,4365 6395,4365 6620,4140 JD1.TX
NetR3_1: R3.1 U1.46 | length 256.6
  Top Layer w5: U1.46 6179.25,4764.25 6206.77,4791.77 R3.1
NetR4_1: R4.1 U1.47 | length 218.6
  Top Layer w5: R4.1 6143.23,4791.77 6144.98,4790.02 6163.5,4771.5 U1.47
NetR5_1: R5.1 R6.2 U1.56 U2.1 | length 467.8
  Top Layer w5: v1(5930,4700) 5975,4655 6015,4655 6021.77,4648.23 U1.56
  Bottom Layer w5: R6.2 R5.1 5885,4745 v1(5930,4700) 5930,4755 5965,4790 U2.1
NetR6_1: R6.1 S1.3 | length 213.3
  Bottom Layer w5: S1.3 5668.9,4778.9 5730,4840 R6.1
NetR7_2: R7.2 U1.21 | length 477.5
  Top Layer w5: R7.2 5780,4350 5865,4265 6085,4265 6116.26,4296.26 U1.21
NetR15_2: R15.2 S2.4 U1.17 | length 2084.2
  Top Layer w5: v1(5855,4347.5) 5953.36,4347.5 5985.86,4315 6040,4315 6053.27,4328.27 U1.17 U1.17@6051.83,4352.9
  Bottom Layer w5: v1(5855,4347.5) 5797.5,4347.5 5595,4145 5595,3680 5900,3375 5900,3286.32 R15.2
  Bottom Layer w10: S2.4 5403.59,3286.32 5895.22,3286.32 R15.2
NetR16_2: R16.2 S2.K | length 311.2
  Bottom Layer w10: S2.K R16.2
NetS2_A: S2.A U1.18 | length 2508.1
  Top Layer w5: v1(5905,4322.5) 5927.5,4300 6040,4300 6069.02,4329.02 U1.18
  Bottom Layer w5: S2.A 5295,3329.91 5295,3225 5330,3190 5892.07,3190 5931.12,3229.05 5931.12,3378.88 5640,3670 5640,4170 5792.5,4322.5 v1(5905,4322.5)
NetU1_27: U1.27
NetU1_28: U1.28
NetU1_29: U1.29
NetU1_30: U1.30
NetU1_31: U1.31
NetU1_32: U1.32
NetU1_34: U1.34
NetU1_35: U1.35
NetU1_36: U1.36
NetU1_37: U1.37
NetU1_38: U1.38
NetU1_39: U1.39
NetU1_40: U1.40
NetU1_41: U1.41
NetU1_51: U1.51 U2.7 | length 349.2
  Top Layer w5: U1.51 6100.51,4686.45 6110,4695.94 v1(6110,4700)
  Bottom Layer w5: v1(6110,4700) 6165,4755 6165,4815 6190,4840 U2.7
NetU1_52: U1.52 U2.6 | length 438.1
  Top Layer w5: v1(6074,4700) 6074,4696.78 6084.76,4686.02 U1.52
  Bottom Layer w5: v1(6074,4700) 6135,4761 6135,4875 6150,4890 U2.6
NetU1_53: U1.53 U2.5 | length 520.1
  Top Layer w5: v1(6038,4700) 6069.02,4668.98 U1.53
  Bottom Layer w5: v1(6038,4700) 6100,4762 6100,4905 6135,4940 U2.5
NetU1_54: U1.54 U2.3 | length 369.8
  Top Layer w5: v1(6002,4700) 6027,4675 6035,4675 6053.27,4656.73 U1.54
  Bottom Layer w5: v1(6002,4700) 6075,4773 6075,4850 6039.33,4885.67 6007.41,4885.67 U2.3
NetU1_55: U1.55 U2.2 | length 339.8
  Top Layer w5: v1(5966,4700) 6001,4665 6024.59,4665 6037.52,4652.07 U1.55
  Bottom Layer w5: v1(5966,4700) 6026,4760 6035,4760 6050,4775 6050,4830 6040,4840 U2.2
VBus: D1.A J1.A4_B9 J1.B4_A9 R8.1 | length 2938.2
  Top Layer w5: R8.1 4847.15,4580 4918.72,4651.57 D1.A
  Top Layer w10: D1.A 5148.72,5015 6570,5015 6840,4745 6840,4639.41 6805.97,4605.38 6805.97,4589.03 ; J1.A4_B9 6810.05,4400.05 6840,4430 6840,4555 6805.97,4589.03 ; J1.B4_A9 6805.97,4589.03
pads on no net: *.1@2245,3715 *.2@2314.46,2039.68 *.2@2345,3715 *.2@2570,2020 *.2@2849.46,2000.31 *.2@3169.46,1980.63 *.3@2445,3715 *.4@2545,3715 *.5@2645,3715 *.6@2745,3715 *.7 *.8 *.9 *.10 *.11@3245,3715 *.12@3345,3715 *.13@2245,3615 *.14@2345,3615 *.15@2445,3615 *.16@2545,3615 *.17 *.18 *.19 *.20 *.21 *.22 *.23 *.24 *.25 *.26 *.27 *.28 *.29 *.30 *.31 *.32 *.33 *.34 *.35 *.36 *.37 *.38 *.39 *.40 *.41 *.42 *.43 *.44 *.45 *.46 *.47 *.48 *.49 *.50 *.51 *.52 *.53 *.54 *.55 *.56 *.57 *.58 *.59 *.60 *.61 *.62 *.63 *.64 *.65 *.66 *.67 *.68 *.69 *.70 *.71 *.72 *.73 *.74 *.75 *.76 *.77 *.78 *.79 *.80 *.81 *.82 *.83 *.84 *.85 *.86 *.87 *.88 *.89 *.90 *.91 *.92 *.93 *.94 *.95 *.96 *.97 *.98 *.99 *.100 *.101 *.102 *.103 *.104 *.105 *.106 *.107 *.108 *.109 *.110 *.111 *.112 *.113 *.114 *.115 *.116 *.117 *.118 *.119 *.120 *.121 *.122 *.123 *.124 *.125 *.126 *.127 *.128 *.129 *.130 *.131 *.132 *.133 *.134 *.135 *.136 *.137 *.138 *.139 *.140 *.141 *.142 *.143 *.144 *.S1 *.S2 *.S3 *.S4 J1.A8 J1.B6 J1.B7 J1.B8 J3. S1.1 S1.4 S2.2 S2.3 U1.19
copper on no net: | length 25190
  Bottom Layer w10: 890,5075 890,2840 890,5075 ; 890,5075 7060,5075 7060,885 890,885 890,5075

## Polygon pours and split planes (outlines as drawn)
GND on Bottom Layer "GND_L02_P000" (solid, pour order 0): 890,5075 890,2840 1010,2840 1060,2790 1060,2560 1010,2510 890,2510 890,885 7060,885 7060,5075

## Silkscreen, mask and mechanical layers (free items; w line width, h text height)
Top Overlay:
  text "Test PCB V1.0" at 1155,1295 h60
  text "Basic Components & Rp2040" at 1155,1170 h60
  text "23.02.2024" at 1155,1040 h60

## Text inside footprints (layer, text, board x,y; h text height)
*: Top Overlay "M3" at 2604.46,2150.63 h60 r90; Top Overlay "M4" at 2874.46,2150.63 h60 r90; Top Overlay "M5" at 3193.89,2150.63 h60 r90; Top Overlay "Screw Mounts" at 2139.46,1460.63 h60; Top Overlay "2.2mm" at 2234.46,1619.77 h60 r45; Top Overlay "M2" at 2344.46,2150.63 h60 r90; Top Overlay "3.2mm" at 2469.46,1619.77 h60 r45; Top Overlay "4.3mm" at 2754.46,1619.77 h60 r45; Top Overlay "5.3mm" at 3079.46,1619.77 h60 r45
*: Top Overlay "1.62mm / 63.78mil" at 2395,2360 h40; Top Overlay "1" at 2240,3845 h40; Top Overlay "2" at 2335,3845 h40; Top Overlay "3" at 2435,3845 h40; Top Overlay "4" at 2530,3845 h40; Top Overlay "5" at 2635,3845 h40; Top Overlay "6" at 2730,3845 h40; Top Overlay "7" at 2835,3845 h40; Top Overlay "8" at 2930,3845 h40; Top Overlay "9" at 3030,3845 h40; Top Overlay "10" at 3115,3845 h40; Top Overlay "11" at 3220,3845 h40; Top Overlay "12" at 3320,3845 h40; Top Overlay "1" at 2060,3725 h40 r270; Top Overlay "2" at 2060,3630 h40 r270; Top Overlay "3" at 2060,3530 h40 r270; Top Overlay "4" at 2060,3435 h40 r270; Top Overlay "5" at 2060,3330 h40 r270; Top Overlay "6" at 2060,3235 h40 r270; Top Overlay "7" at 2060,3130 h40 r270; Top Overlay "8" at 2060,3035 h40 r270; Top Overlay "9" at 2060,2935 h40 r270; Top Overlay "10" at 2060,2850 h40 r270; Top Overlay "11" at 2060,2745 h40 r270; Top Overlay "12" at 2060,2645 h40 r270; Top Overlay "1.27mm / 50.00mil" at 2395,2430 h40; Top Overlay "2.54mm / 100mil" at 3525,3100 h40 r270
JD1: Top Overlay "GND" at 6745,3375 h40 r90; Top Overlay "RX" at 6843.34,3414.99 h40 r90; Top Overlay "TX" at 6635,3414.99 h40 r90; Top Overlay "Debug" at 6630,3608.33 h40
U4: Top Overlay "Battery Balancer" at 1860,2695.01 h60 r180
UX1: Top Overlay "-IN" at 2083,4013 h80; Top Overlay "+IN" at 2073,4738 h80; Top Overlay "-OUT" at 3183,4018 h80; Top Overlay "+OUT" at 3198,4733 h80; Top Overlay "LM2596" at 2630,4430 h60